# Altium PCB PCB1.pcbdoc (part 4 of 4)
Units mil, origin at the board's own origin, x right, y up, seen from the top; angles counter-clockwise.
Board outline 3067 x 4292.31 mil, 4 copper layers (Top Layer, Inner1, Inner2, Bottom Layer); 120 components, 131 nets, 693 pads, 342 vias.
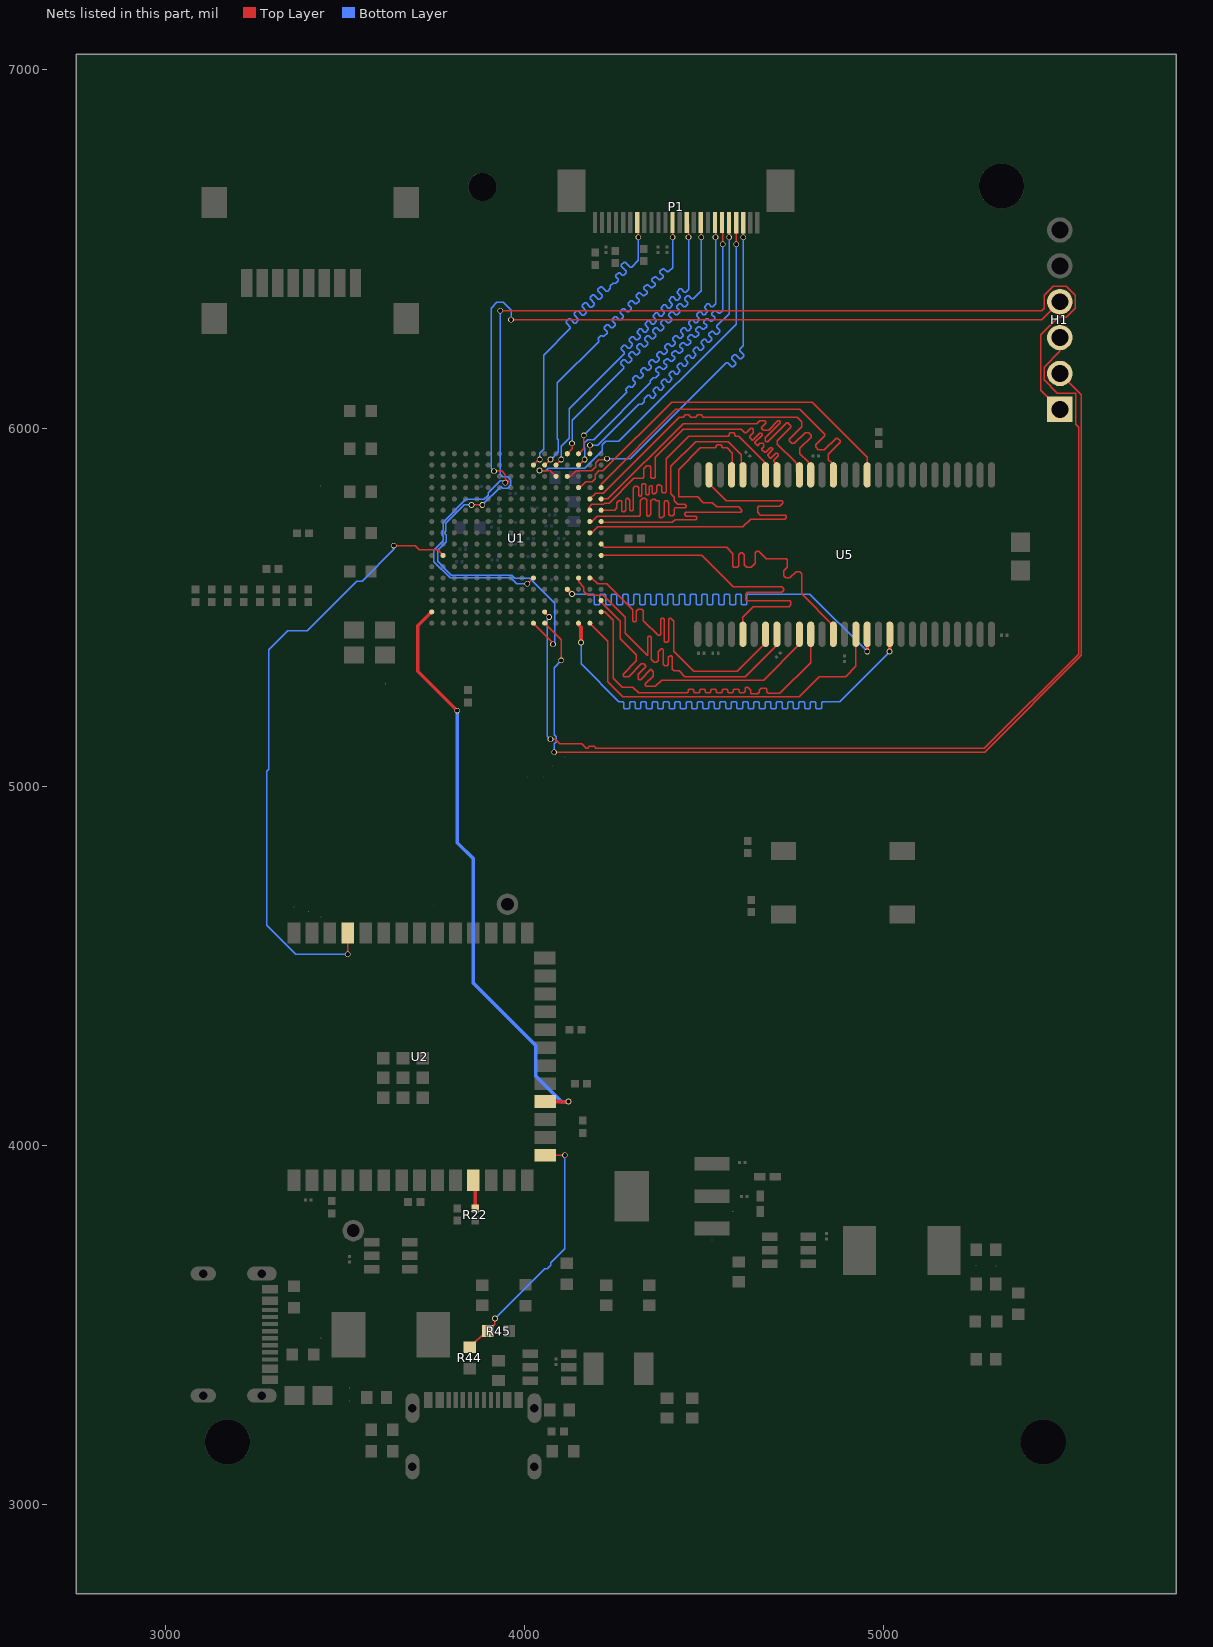
[diagram p6: the nets of this part, all layers, seen from the top]

## Via types
v1: diameter 15.75, hole 11.81, Top Layer to Bottom Layer, 336 vias
v2: diameter 19.68, hole 11.81, Top Layer to Bottom Layer, 4 vias
v3: diameter 39.37, hole 19.68, Top Layer to Bottom Layer, 2 vias

## Nets (pads, with @x,y where several pads share a name; then routed paths per layer and width w, separated by ;. In a path a pad name is that pad's centre, name@x,y a point inside that pad or via, vN(x,y) a via of type N, cw(c..) or ccw(c..) an arc to the next point about the centre after c; other vN are vias at no path point) (continued)
SD_DQ2: U1.K16 U5.5 | length 1006.3
  Top Layer w3.94: U1.K16@4213.53,5645.07 4494.56,5645.07 4582.31,5557.31 4717.31,5557.31 4722.31,5552.31 4722.31,5547.31 4716.67,5541.67 4620.95,5541.67 4616.6,5537.31 4616.6,5521.39 4618.96,5519.04 4739.53,5519.04 4742.31,5516.25 4742.31,5507.31 4737.36,5502.36 4637.36,5502.36 4608.18,5473.18 4608.18,5440.86 4608.85,5440.19 U5.5@4608.85,5430.19
SD_DQ3: U1.M15 U5.7 | length 978.3
  Top Layer w3.94: U1.M15@4182.03,5582.07 4185.17,5582.07 4185.76,5581.49 4187.62,5581.49 4203.49,5565.62 4229.01,5565.62 4301.71,5492.92 4301.71,5462.31 4304.49,5459.53 4308.43,5459.53 4311.22,5462.31 4311.22,5488.96 4317.31,5495.06 4327.31,5495.06 4331.25,5491.12 4331.25,5463.38 4372.31,5422.31 4377.31,5422.31 4379.59,5424.59 4379.59,5467.31 4382.38,5470.1 4386.31,5470.1 4389.1,5467.31 4389.1,5405.53 4392.31,5402.31 4397.31,5402.31 4402.18,5407.18 4402.18,5467.31 4404.5,5469.63 4407.78,5469.63 4416.54,5460.88 4416.54,5378.09 4472.31,5322.31 4592.52,5322.31 4666.17,5395.97 4666.17,5419.51 4666.85,5420.19 4666.85,5425.19 U5.7@4671.85,5430.19
SD_DQ4: U1.M14 U5.8 | length 1016.4
  Top Layer w3.94: U1.M14@4150.55,5582.07 4150.55,5571.85 4165.58,5556.81 4165.58,5545.77 4177.23,5534.12 4219.76,5534.12 4281.26,5472.62 4281.26,5427.31 4342.59,5365.99 4343.85,5367.25 4343.85,5417.31 4346.63,5420.1 4350.57,5420.1 4353.35,5417.31 4353.35,5355.23 4361.26,5347.31 4367.31,5347.31 4372,5352 4372,5376.5 4380.59,5385.1 4384.53,5385.1 4387.31,5382.31 4387.31,5341.25 4391.25,5337.31 4397.31,5337.31 4400.94,5340.94 4400.94,5360.45 4405.59,5365.1 4409.53,5365.1 4412.31,5362.31 4412.31,5328.19 4417.31,5323.19 4430.7,5323.19 4446.57,5307.31 4614.73,5307.31 4709.52,5402.1 4709.52,5424 U5.8@4703.34,5430.19
SD_DQ5: U1.P16 U5.10 | length 1006.4
  Top Layer w3.94: U1.P16@4213.53,5519.09 4213.53,5514.8 4266.5,5461.83 4266.5,5413.13 4311.13,5368.5 4311.13,5350.63 4274.53,5314.04 4274.53,5310.1 4277.31,5307.31 4289.92,5307.31 4324.92,5342.31 4332.31,5342.31 4337.31,5337.31 4337.31,5334.72 4316.82,5314.23 4316.82,5301.82 4319.6,5299.03 4323.54,5299.03 4352.07,5327.56 4358.71,5320.92 4358.71,5308.22 4337.03,5286.54 4337.03,5282.59 4339.82,5279.81 4364.81,5279.81 4382.31,5297.31 4667.01,5297.31 4766.34,5396.64 U5.10@4766.34,5430.19
SD_DQ6: U1.R16 U5.11 | length 990.6
  Top Layer w3.94: U1.R16@4213.53,5487.6 4223.92,5487.6 4247.31,5464.2 4247.31,5302.31 4272.18,5277.45 4302.18,5277.45 4317.95,5261.68 4453.44,5261.68 4456.23,5264.47 4456.23,5269.53 4459.01,5272.31 4469.19,5272.31 4471.97,5269.53 4471.97,5264.47 4474.76,5261.68 4484.94,5261.68 4487.72,5264.47 4487.72,5269.53 4490.51,5272.31 4500.69,5272.31 4503.47,5269.53 4503.47,5264.47 4506.25,5261.68 4516.43,5261.68 4519.22,5264.47 4519.22,5269.53 4522,5272.31 4532.18,5272.31 4534.97,5269.53 4534.97,5264.47 4537.75,5261.68 4547.93,5261.68 4550.71,5264.47 4550.71,5269.53 4553.5,5272.31 4563.68,5272.31 4566.46,5269.53 4566.46,5264.47 4569.25,5261.68 4579.43,5261.68 4582.21,5264.47 4582.21,5269.53 4584.99,5272.31 4595.17,5272.31 4597.96,5269.53 4597.96,5264.47 4600.74,5261.68 4611.66,5261.68 4615.59,5265.62 4615.59,5274.53 4618.38,5277.31 4622.31,5277.31 4630.43,5269.2 4630.43,5259.31 4650.59,5259.31 4654.53,5263.25 4654.53,5269.53 4659.53,5274.53 4672.31,5274.53 4675.1,5271.75 4675.1,5264.42 4679.04,5260.49 4711.76,5260.49 4797.31,5346.04 U5.11@4797.31,5410.31
SD_DQ7: U1.J16 U5.13 | length 993.5
  Top Layer w3.94: U1.J16@4213.53,5676.56 4222.78,5667.31 4563.4,5667.31 4580.59,5650.1 4580.59,5614.6 4583.38,5611.82 4592.88,5611.82 4596.82,5615.75 4596.82,5647.31 4602.19,5652.69 4606.94,5652.69 4612.39,5647.24 4612.39,5618.31 4618.88,5611.82 4631.82,5611.82 4642.95,5622.95 4642.95,5652.95 4647.31,5657.31 4652.95,5657.31 4675.31,5634.95 4675.46,5635.1 4729.53,5635.1 4732.31,5632.31 4732.31,5612.68 4722.31,5602.68 4722.31,5587.95 4727.95,5582.31 4739.63,5582.31 4756.78,5599.47 4767.31,5599.47 4772.41,5594.37 4772.41,5537.89 ; 4772.39,5537.87 4860.81,5449.45 U5.13@4860.81,5430.19
SD_DQ8: U1.D16 U5.42 | length 993.1
  Top Layer w3.94: U1.D16@4213.53,5834.05 4213.53,5844.05 4421.81,6052.31 4767.31,6052.31 4837.31,5982.31 4837.31,5979.13 4811.5,5953.31 4811.5,5947.31 4818.88,5939.93 4836,5939.93 4868.38,5972.31 4872.31,5972.31 4880.1,5964.53 4880.1,5960.1 4877.31,5957.31 4877.08,5957.31 4846.5,5926.74 4846.5,5912.31 4855.81,5903 4855.81,5879.44 U5.42@4860.81,5874.44
SD_DQ9: U1.E15 U5.44 | length 985.5
  Top Layer w3.94: U1.E15@4182.03,5802.56 4198.49,5819.01 4219.76,5819.01 4430.57,6029.81 4442.38,6029.81 4445.17,6032.6 4445.17,6034.53 4447.95,6037.31 4458.13,6037.31 4460.92,6034.53 4460.92,6032.6 4463.7,6029.81 4477.29,6029.81 4480.07,6032.6 4480.07,6034.53 4482.86,6037.31 4493.04,6037.31 4495.82,6034.53 4495.82,6032.6 4498.6,6029.81 4759.81,6029.81 4772.31,6017.31 4772.31,6003.97 4737.31,5968.97 4737.31,5964.7 4744.7,5957.31 4752.31,5957.31 4782.31,5987.31 4792.31,5987.31 4798.98,5980.65 4798.98,5975.08 4767.31,5943.41 4767.31,5928.51 4790.32,5905.5 4790.32,5881.94 U5.44@4797.82,5874.44
SD_DQ10: U1.E16 U5.45 | length 982.3
  Top Layer w3.94: U1.E16@4213.53,5802.56 4232.56,5802.56 4442.31,6012.31 4647.72,6012.31 4655.51,6020.1 4669.53,6020.1 4672.31,6017.31 4672.31,6013.93 4659.21,6000.83 4665.44,5994.6 4680.09,5994.6 4705.59,6020.1 4709.53,6020.1 4712.31,6017.31 4712.31,6014.69 4671.13,5973.5 4671.13,5964.57 4673.91,5961.78 4677.85,5961.78 4730.35,6014.28 4734.28,6014.28 4742.31,6006.25 4742.31,6002.31 4704.49,5964.49 4704.49,5955.55 4752.63,5907.41 4752.63,5907.2 4757.91,5901.93 4757.91,5878.38 4761.84,5874.44 U5.45@4766.34,5874.44
SD_DQ11: U1.F15 U5.47 | length 987.3
  Top Layer w3.94: U1.F15@4182.03,5771.06 4177.03,5776.06 4177.03,5777.03 4187.52,5787.52 4219.76,5787.52 4223.34,5791.09 4236.09,5791.09 4304.53,5859.53 4329.53,5859.53 4332.31,5862.31 4332.31,5887.31 4340.32,5895.32 4348.38,5895.32 4352.31,5891.39 4352.31,5862.31 4355.1,5859.53 4360.98,5859.53 4363.76,5862.31 4363.76,5918.76 4442.31,5997.31 4604.02,5997.31 4614.25,5987.08 4617.58,5987.08 4630.59,6000.1 4634.53,6000.1 4637.31,5997.31 4637.31,5987.31 4627.32,5977.32 4627.32,5974.01 4634.62,5966.71 4636.71,5966.71 4655.1,5985.1 4659.53,5985.1 4662.31,5982.31 4662.31,5980.56 4642.31,5960.56 4642.31,5959.02 4650.17,5951.16 4656.32,5957.31 4664.82,5957.31 4667.31,5954.82 4667.31,5948.54 4661.09,5942.31 4661.09,5940.25 4669.02,5932.31 4672.31,5932.31 4685.1,5945.1 4689.53,5945.1 4692.31,5942.31 4692.31,5940.4 4677.31,5925.4 4677.31,5924.02 4685,5916.34 4686.83,5916.34 4700.59,5930.1 4704.53,5930.1 4707.31,5927.31 4707.31,5923.45 4694.02,5910.15 4694.02,5907.31 4703.34,5898 U5.47@4703.34,5874.44
SD_DQ12: U1.F16 U5.48 | length 986.3
  Top Layer w3.94: U1.F16@4213.53,5771.06 4251.06,5771.06 4257.31,5777.31 4257.31,5792.31 4262.31,5797.31 4268.87,5797.31 4270.59,5795.59 4270.59,5770.1 4273.38,5767.31 4277.31,5767.31 4281.58,5771.58 4281.58,5801.58 4283.86,5803.86 4287.31,5803.86 4292.63,5798.54 4292.63,5772.49 4295.59,5769.53 4299.53,5769.53 4302.31,5772.31 4302.31,5832.31 4307.31,5837.31 4314.65,5837.31 4317.81,5834.16 4317.81,5812.31 4320.59,5809.53 4323.28,5809.53 4327.31,5813.56 4327.31,5842.14 4329.78,5844.6 4335.03,5844.6 4337.81,5841.82 4337.81,5817.31 4340.59,5814.53 4344.53,5814.53 4347.31,5817.31 4347.31,5837.31 4349.84,5839.84 4354.79,5839.84 4356.17,5838.46 4356.17,5819.52 4358.96,5816.73 4362.9,5816.73 4368.48,5822.31 4368.48,5838.48 4372.31,5842.31 4377.31,5842.31 4382.31,5837.31 4382.31,5822.31 4385.1,5819.53 4391.74,5819.53 4394.53,5822.31 4394.53,5914.53 4457.31,5977.31 4567.89,5977.31 4570.67,5980.1 4570.67,5984.53 4573.46,5987.31 4583.64,5987.31 4586.42,5984.53 4586.42,5980.1 4589.21,5977.31 4597.31,5977.31 4669.54,5905.09 4669.54,5878.38 4671.85,5876.08 U5.48@4671.85,5874.44
SD_DQ13: U1.G15 U5.50 | length 986.5
  Top Layer w3.94: U1.G15@4182.03,5739.56 4187.6,5739.56 4202.64,5754.59 4319.59,5754.59 4322.31,5757.31 4322.31,5797.31 4329.53,5804.53 4335.1,5804.53 4340.1,5799.53 4340.1,5757.31 4342.88,5754.53 4346.82,5754.53 4352.31,5760.03 4352.31,5797.31 4357.31,5802.31 4362.31,5802.31 4367.31,5797.31 4375.83,5797.31 4375.83,5752.31 4378.62,5749.53 4382.56,5749.53 4388.83,5755.8 4388.83,5795.09 4391.06,5797.31 4397.31,5797.31 4402.31,5792.31 4402.31,5760.19 4406.25,5756.25 4413.38,5756.25 4417.31,5760.19 4417.31,5775.68 4418.95,5777.31 4447.31,5777.31 4450.1,5780.1 4450.1,5784.04 4447.01,5787.12 4427.51,5787.12 4417.31,5797.31 4417.31,5806.82 4407.77,5816.36 4407.77,5893.01 4477.08,5962.31 4567.31,5962.31 4604.19,5925.44 4604.19,5879.11 U5.50@4608.85,5874.44
SD_DQ14: U1.G16 U5.51 | length 983.1
  Top Layer w3.94: U1.G16@4213.53,5739.56 4216.03,5737.06 4412.06,5737.06 4419.68,5744.68 4477.31,5744.68 4480.1,5747.46 4480.1,5751.4 4477.31,5754.18 4450.45,5754.18 4446.01,5758.62 4446.01,5761.01 4449.74,5764.74 4602.31,5764.74 4605.1,5767.53 4605.1,5771.46 4596.46,5780.1 4535.59,5780.1 4523.38,5792.31 4498.83,5792.31 4482.31,5808.83 4429.18,5808.83 4429.18,5884.18 4489.81,5944.81 4531.69,5944.81 4534.47,5947.6 4534.47,5950.5 4537.26,5953.29 4547.44,5953.29 4550.22,5950.5 4550.22,5947.6 4553,5944.81 4564.81,5944.81 4579.18,5930.45 4579.18,5887.62 U5.51@4579.85,5886.94
SD_DQ15: U1.H15 U5.53 | length 996.9
  Top Layer w3.94: U1.H15@4182.03,5708.06 4187.03,5708.06 4203.49,5724.52 4608.45,5724.52 4630.39,5746.46 4725.96,5746.46 4730.1,5750.59 4730.1,5754.53 4727.31,5757.31 4657.31,5757.31 4649.53,5765.1 4649.53,5779.53 4652.31,5782.31 4711.82,5782.31 4720.1,5790.59 4720.1,5794.53 4717.31,5797.31 4562.31,5797.31 4519.36,5840.27 U5.53@4519.36,5869.44
SD_DQM0: U1.T15 U5.15 | length 1017.6
  Top Layer w3.94: U1.T15@4182.03,5456.1 4232.32,5405.8 4232.31,5292.32 4273.19,5251.44 4765.12,5251.44 4821,5307.31 4895.76,5307.31 4923.81,5335.37 U5.15@4923.81,5425.19
SD_DQM1: U1.D14 U5.39 | length 1020
  Top Layer w3.94: U1.D14@4150.55,5834.05 4154.05,5834.05 4170.51,5850.51 4188.26,5850.51 4197.07,5859.32 4197.07,5870.35 4207.31,5880.58 4218.35,5880.58 4410.08,6072.32 4801.7,6072.32 4955.65,5918.37 4955.65,5879.45 U5.39@4950.65,5874.44
SD_RAS_N: U1.T14 U5.18 | length 1722.8
  Top Layer w10: U1.T14@4152.31,5449.56 4157.31,5444.56 v1(4157.31,5402.31) ; v1(5017.31,5377.31) 5018.3,5378.3 U5.18@5018.3,5425.19
  Bottom Layer w3.94: v1(4157.31,5402.31) 4157.31,5342.31 4262.31,5237.31 4274.13,5237.31 4276.91,5234.53 4276.91,5220.1 4279.69,5217.31 4289.87,5217.31 4292.66,5220.1 4292.66,5234.53 4295.44,5237.31 4305.62,5237.31 4308.41,5234.53 4308.41,5220.1 4311.19,5217.31 4321.37,5217.31 4324.15,5220.1 4324.15,5234.53 4326.94,5237.31 4337.12,5237.31 4339.9,5234.53 4339.9,5220.1 4342.69,5217.31 4352.87,5217.31 4355.65,5220.1 4355.65,5234.53 4358.43,5237.31 4368.61,5237.31 4371.4,5234.53 4371.4,5220.1 4374.18,5217.31 4384.36,5217.31 4387.15,5220.1 4387.15,5234.53 4389.93,5237.31 4400.11,5237.31 4402.89,5234.53 4402.89,5220.1 4405.68,5217.31 4415.86,5217.31 4418.64,5220.1 4418.64,5234.53 4421.43,5237.31 4431.61,5237.31 4434.39,5234.53 4434.39,5220.1 4437.17,5217.31 4447.35,5217.31 4450.14,5220.1 4450.14,5234.53 4452.92,5237.31 4463.1,5237.31 4465.89,5234.53 4465.89,5220.1 4468.67,5217.31 4478.85,5217.31 4481.63,5220.1 4481.63,5234.53 4484.42,5237.31 4494.6,5237.31 4497.38,5234.53 4497.38,5220.1 4500.17,5217.31 4510.35,5217.31 4513.13,5220.1 4513.13,5234.53 4515.91,5237.31 4526.09,5237.31 4528.88,5234.53 4528.88,5220.1 4531.66,5217.31 4541.84,5217.31 4544.63,5220.1 4544.63,5234.53 4547.41,5237.31 4557.59,5237.31 4560.37,5234.53 4560.37,5220.1 4563.16,5217.31 4573.34,5217.31 4576.12,5220.1 4576.12,5234.53 4578.91,5237.31 4589.09,5237.31 4591.87,5234.53 4591.87,5220.1 4594.65,5217.31 4604.83,5217.31 4607.62,5220.1 4607.62,5234.53 4610.4,5237.31 4620.58,5237.31 4623.37,5234.53 4623.37,5220.1 4626.15,5217.31 4636.33,5217.31 4639.11,5220.1 4639.11,5234.53 4641.9,5237.31 4652.08,5237.31 4654.86,5234.53 4654.86,5220.1 4657.65,5217.31 4667.83,5217.31 4670.61,5220.1 4670.61,5234.53 4673.39,5237.31 4683.57,5237.31 4686.36,5234.53 4686.36,5220.1 4689.14,5217.31 4699.32,5217.31 4702.11,5220.1 4702.11,5234.53 4704.89,5237.31 4715.07,5237.31 4717.85,5234.53 4717.85,5220.1 4720.64,5217.31 4730.82,5217.31 4733.6,5220.1 4733.6,5234.53 4736.39,5237.31 4746.57,5237.31 4749.35,5234.53 4749.35,5220.1 4752.13,5217.31 4762.31,5217.31 4765.1,5220.1 4765.1,5234.53 4767.88,5237.31 4778.06,5237.31 4780.85,5234.53 4780.85,5220.1 4783.63,5217.31 4793.81,5217.31 4796.59,5220.1 4796.59,5234.53 4799.38,5237.31 4809.56,5237.31 4812.34,5234.53 4812.34,5220.1 4815.13,5217.31 4825.31,5217.31 4828.09,5220.1 4828.09,5234.53 4830.87,5237.31 4879.19,5237.31 5017.31,5375.44 v1(5017.31,5377.31)
SD_WE_N: U1.N13 U5.16 | length 1704.6
  Top Layer w10: U1.N13@4119.05,5550.59 v1(4132.31,5537.31) ; v1(4955.31,5377.31) U5.16@4955.31,5425.19
  Bottom Layer w3.94: v1(4132.31,5537.31) 4191.69,5537.31 4194.48,5534.53 4194.48,5510.1 4197.26,5507.31 4207.44,5507.31 4210.23,5510.1 4210.23,5534.53 4213.01,5537.31 4223.19,5537.31 4225.97,5534.53 4225.97,5510.1 4228.76,5507.31 4238.94,5507.31 4241.72,5510.1 4241.72,5534.53 4244.51,5537.31 4254.69,5537.31 4257.47,5534.53 4257.47,5510.1 4260.25,5507.31 4270.43,5507.31 4273.22,5510.1 4273.22,5534.53 4276,5537.31 4286.18,5537.31 4288.97,5534.53 4288.97,5510.1 4291.75,5507.31 4301.93,5507.31 4304.71,5510.1 4304.71,5534.53 4307.5,5537.31 4317.68,5537.31 4320.46,5534.53 4320.46,5510.1 4323.25,5507.31 4333.43,5507.31 4336.21,5510.1 4336.21,5534.53 4338.99,5537.31 4349.17,5537.31 4351.96,5534.53 4351.96,5510.1 4354.74,5507.31 4364.92,5507.31 4367.71,5510.1 4367.71,5534.53 4370.49,5537.31 4380.67,5537.31 4383.45,5534.53 4383.45,5510.1 4386.24,5507.31 4396.42,5507.31 4399.2,5510.1 4399.2,5534.53 4401.99,5537.31 4412.17,5537.31 4414.95,5534.53 4414.95,5510.1 4417.73,5507.31 4427.91,5507.31 4430.7,5510.1 4430.7,5534.53 4433.48,5537.31 4443.66,5537.31 4446.45,5534.53 4446.45,5510.1 4449.23,5507.31 4459.41,5507.31 4462.19,5510.1 4462.19,5534.53 4464.98,5537.31 4475.16,5537.31 4477.94,5534.53 4477.94,5510.1 4480.73,5507.31 4490.91,5507.31 4493.69,5510.1 4493.69,5534.53 4496.47,5537.31 4506.65,5537.31 4509.44,5534.53 4509.44,5510.1 4512.22,5507.31 4522.4,5507.31 4525.19,5510.1 4525.19,5534.53 4527.97,5537.31 4538.15,5537.31 4540.93,5534.53 4540.93,5510.1 4543.72,5507.31 4553.9,5507.31 4556.68,5510.1 4556.68,5534.53 4559.47,5537.31 4569.65,5537.31 4572.43,5534.53 4572.43,5510.1 4575.21,5507.31 4585.39,5507.31 4588.18,5510.1 4588.18,5534.53 4590.96,5537.31 4601.14,5537.31 4603.93,5534.53 4603.93,5510.1 4606.71,5507.31 4616.89,5507.31 4619.67,5510.1 4619.67,5534.53 4622.46,5537.31 4795.31,5537.31 v1(4955.31,5377.31)
SDA: R22.1 U2.11 | length 75.5
  Top Layer w10: R22.1@3862.12,3827.32 U2.11@3862.12,3902.82
SSPI_CS_N: U1.R1 U2.18 | length 1626.8
  Top Layer w10: U1.R1@3741.09,5487.6 3702.32,5448.81 3702.32,5322.31 v1(3812.32,5212.31) ; U2.18@4062.51,4122.31 v1(4122.31,4122.31)
  Bottom Layer w10: v1(3812.32,5212.31) 3812.32,4844.07 3857.32,4799.07 3857.32,4452.31 4031.25,4278.38 4031.25,4193.38 4102.31,4122.31 v1(4122.31,4122.31)
TCK: H1.1 U1.T10 | length 3482.3
  Top Layer w3.94: v1(3852.16,5785.71) 3860.46,5785.71 3860.85,5786.09 3873.3,5786.09 3873.69,5785.71 3880.71,5785.71 v1@3882.32,5787.31 ; v1(3932.32,6327.31) 5441.68,6327.31 5448.93,6334.57 5448.93,6370.29 5474.34,6395.7 5510.29,6395.7 5535.7,6370.29 5535.7,6334.34 5510.29,6308.93 5487.57,6308.93 5439.05,6260.41 5439.05,6105.58 H1.1@5492.31,6052.31 ; U1.T10@4024.55,5456.1 4079.05,5401.6 v1(4079.05,5397.31)
  Bottom Layer w3.94: v1(3852.16,5785.71) 3831.85,5785.71 3780.54,5734.4 3780.54,5712.5 3778.6,5710.56 3778.6,5704.55 3781.02,5702.13 3781.02,5682.5 3757.32,5658.8 3757.32,5628.45 3795.58,5590.19 3964.82,5590.19 3973.23,5581.78 4013.87,5581.78 4084.21,5511.44 4084.21,5402.48 v1(4079.05,5397.31) ; v1(3882.32,5785.71) 3932.32,5835.71 3935.65,5835.71 3939.26,5832.09 3952.38,5832.09 3961.65,5841.36 3961.65,5854.48 3952.38,5863.75 3939.26,5863.75 3932.32,5870.7 v1(3932.32,6327.31)
TDI: H1.3 U1.R11 | length 2931.3
  Top Layer w3.94: U1.R11@4056.05,5487.6 4056.05,5485.72 v1(4068.39,5473.39) ; v1(4072.32,5132.31) 4085.24,5132.31 4098.11,5119.44 4159.13,5119.44 4171.25,5107.32 4175.76,5107.32 4180.76,5112.31 4193.87,5112.31 4198.87,5107.32 5282.32,5107.32 5544.44,5369.44 5544.44,6001.94 5536.06,6010.33 5536.06,6097.44 5485.83,6097.44 5448.93,6134.34 5448.93,6170.29 5492.31,6213.67 H1.3@5492.31,6252.31
  Bottom Layer w3.94: v1(4068.39,5473.39) 4063.22,5468.22 4063.22,5141.41 v1(4072.32,5132.31)
TDO: H1.4 U1.M10 | length 2836.6
  Top Layer w3.94: v1(3914.81,5879.9) 3923.16,5879.9 3923.85,5880.58 3936.3,5880.58 3946.53,5870.35 3946.53,5859.32 3955.34,5850.51 3955.34,5849.08 3954.17,5847.92 v1(3945.82,5847.92) ; v1(3962.32,6302.31) 5442.31,6302.31 H1.4@5492.31,6352.31 ; v1(4007.32,5565.96) 4008.44,5565.96 U1.M10@4024.55,5582.07
  Bottom Layer w3.94: v1(3914.81,5879.9) 3906.49,5888.22 3906.49,6334.52 3922.24,6350.27 3941.18,6350.27 3962.32,6329.13 v1(3962.32,6302.31) ; v1(3945.82,5847.92) 3940.82,5852.92 3931.78,5852.92 3898.14,5819.28 3898.14,5813.11 3886.57,5801.54 3836.54,5801.54 3772.66,5737.66 3772.66,5715.76 3770.72,5713.82 3770.72,5701.29 3773.14,5698.87 3773.14,5685.76 3747.32,5659.93 3747.32,5627.31 3792.32,5582.31 3961.56,5582.31 3977.92,5565.96 v1(4007.32,5565.96)
TMS: H1.2 U1.T11 | length 2784.6
  Top Layer w3.94: U1.T11@4056.05,5456.1 4102.31,5409.84 v1(4102.31,5352.31) ; v1(4082.32,5096.49) 5282.62,5096.49 5552.31,5366.18 5552.31,6092.31 H1.2@5492.31,6152.31
  Bottom Layer w3.94: v1(4082.32,5096.49) 4082.32,5119.93 4088.14,5125.76 4088.14,5138.87 4082.32,5144.7 4082.32,5332.31 v1(4102.31,5352.31)
TX: U1.K2 U2.37 | length 1715.7
  Top Layer w3.94: v1@3507.12,4532.31 U2.37@3507.12,4591.81 ; v1@3632.32,5672.31 3694.93,5672.31 3705.76,5661.49 3756.11,5661.49 ; 3756.14,5661.53 U1.K2@3772.59,5645.07
  Bottom Layer w3.94: v1(3507.12,4533.14) 3361.49,4533.14 3281.41,4613.22 3281.41,5043.5 3287.32,5049.41 3287.32,5382.31 3339.44,5434.44 3393.46,5434.44 3532.63,5573.61 3547.13,5573.61 3635.27,5661.75 v1(3635.27,5672.31)
USB_VBUS: R44.1 R45.2 U2.15 | length 707.4
  Top Layer w3.94: R44.1@3847.32,3436.97 3892.66,3482.32 R45.2@3897.66,3482.32 3917.32,3501.97 v1(3917.32,3517.32) ; U2.15@4057.51,3972.32 v1(4112.31,3972.32)
  Bottom Layer w3.94: v1(3917.32,3517.32) 4056.15,3656.15 4063.87,3656.15 4073.14,3665.42 4073.14,3673.14 4112.31,3712.32 v1(4112.31,3972.32)
VSYNC: P1.7 U1.B10 | length 1065.2
  Top Layer w3.94: U1.B10@4024.55,5897.03 4040.14,5912.62 v1(4042.01,5912.62) ; P1.7@4314.22,6572.88 4317.31,6569.78 v1(4317.31,6532.31)
  Bottom Layer w3.94: v1(4042.01,5912.62) 4042.01,5929.63 4053.14,5940.76 4053.14,6203.14 4127.75,6277.75 4127.75,6281.69 4115.58,6293.86 4115.58,6297.8 4122.78,6305 4126.72,6305 4138.89,6292.82 4142.82,6292.82 4150.02,6300.02 4150.02,6303.96 4137.85,6316.13 4137.85,6320.07 4145.05,6327.27 4148.99,6327.27 4161.16,6315.1 4165.1,6315.1 4172.29,6322.29 4172.29,6326.23 4160.12,6338.4 4160.12,6342.34 4167.32,6349.54 4171.26,6349.54 4183.43,6337.37 4187.37,6337.37 4194.57,6344.57 4194.57,6348.5 4182.39,6360.67 4182.39,6364.61 4189.59,6371.81 4193.53,6371.81 4205.7,6359.64 4209.64,6359.64 4216.84,6366.84 4216.84,6370.77 4204.67,6382.94 4204.67,6386.88 4211.86,6394.08 4215.8,6394.08 4227.97,6381.91 4231.91,6381.91 4239.25,6389.25 4239.25,6396.84 4246.6,6404.18 4254.18,6404.18 4261.38,6411.38 4261.38,6415.32 4254.84,6421.85 4254.84,6425.79 4262.04,6432.99 4265.98,6432.99 4272.51,6426.45 4276.45,6426.45 4283.65,6433.65 4283.65,6437.59 4270.09,6451.15 4270.09,6455.09 4277.29,6462.29 4281.22,6462.29 4294.79,6448.72 4298.72,6448.72 4317.31,6467.31 v1(4317.31,6532.31)
Y2: P1.19 U1.B14 | length 1063
  Top Layer w3.94: U1.B14@4150.55,5897.03 4165.82,5912.31 v1(4167.31,5912.31) ; P1.19@4550.41,6572.88 4552.31,6570.97 v1(4552.31,6512.31)
  Bottom Layer w3.94: v1(4167.31,5912.31) 4167.31,5944.93 4166.49,5945.76 4166.49,5958.87 4175.76,5968.14 4193.14,5968.14 4350.8,6125.8 4350.8,6132.31 4358.67,6140.19 4365.19,6140.19 4373.68,6148.68 4373.68,6152.61 4366.28,6160.02 4366.28,6163.95 4373.47,6171.15 4377.41,6171.15 4384.81,6163.75 4388.75,6163.75 4395.95,6170.95 4395.95,6174.89 4388.55,6182.29 4388.55,6186.22 4395.75,6193.42 4399.68,6193.42 4407.08,6186.02 4411.02,6186.02 4418.22,6193.22 4418.22,6197.16 4410.82,6204.56 4410.82,6208.49 4418.02,6215.69 4421.95,6215.69 4429.36,6208.29 4433.29,6208.29 4440.49,6215.49 4440.49,6219.43 4433.09,6226.83 4433.09,6230.77 4440.29,6237.96 4444.23,6237.96 4451.63,6230.56 4455.56,6230.56 4462.76,6237.76 4462.76,6241.7 4455.36,6249.1 4455.36,6253.04 4462.56,6260.24 4466.5,6260.24 4473.9,6252.83 4477.83,6252.83 4485.03,6260.03 4485.03,6263.97 4477.63,6271.37 4477.63,6275.31 4484.83,6282.51 4488.77,6282.51 4496.17,6275.11 4500.11,6275.11 4507.3,6282.3 4507.3,6286.24 4499.9,6293.64 4499.9,6297.58 4507.1,6304.78 4511.04,6304.78 4518.44,6297.38 4522.38,6297.38 4529.58,6304.58 4529.58,6308.51 4522.17,6315.91 4522.17,6319.85 4529.37,6327.05 4533.31,6327.05 4540.71,6319.65 4544.65,6319.65 4552.31,6327.31 v1(4552.31,6512.31)
Y3: P1.21 U1.C12 | length 1062.7
  Top Layer w3.94: v1(4041.76,5881.72) 4071.38,5881.72 U1.C12@4087.55,5865.55 ; v1(4589.88,6512.31) P1.21@4589.88,6572.76
  Bottom Layer w3.94: v1(4041.76,5881.72) 4059.45,5881.72 4065.71,5887.98 4167.98,5887.98 4216.49,5936.49 4216.49,5953.87 4225.76,5963.14 4263.14,5963.14 4589.88,6289.88 v1(4589.88,6512.31)
Y4: P1.22 U1.C13 | length 1062.8
  Top Layer w3.94: U1.C13@4119.05,5865.55 4129.28,5865.55 4144.32,5880.58 4186.85,5880.58 4198.5,5892.23 4198.5,5903.26 4207.31,5912.07 4226.69,5912.07 v1(4229.63,5915) ; v1(4609.55,6532.31) P1.22@4609.55,6572.76
  Bottom Layer w3.94: v1(4229.63,5915) 4295,5915 4562.52,6182.52 4566.45,6182.52 4577.52,6171.45 4581.45,6171.45 4588.65,6178.65 4588.65,6182.59 4577.59,6193.65 4577.59,6197.59 4584.79,6204.79 4588.73,6204.79 4599.79,6193.73 4603.73,6193.73 4610.92,6200.92 4610.92,6204.86 4599.86,6215.92 4599.86,6219.86 4609.55,6229.55 v1(4609.55,6532.31)
Y5: P1.20 U1.A15 | length 1063.7
  Top Layer w3.94: U1.A15@4182.03,5928.53 4182.31,5928.81 v1(4182.31,5952.31) ; v1(4570.18,6532.31) P1.20@4570.18,6572.76
  Bottom Layer w3.94: v1(4182.31,5952.31) 4203.8,5952.31 4317.88,6066.4 4321.82,6066.4 4322.14,6066.07 4326.07,6066.07 4333.27,6073.27 4333.27,6077.21 4332.95,6077.53 4332.95,6081.47 4343.19,6091.71 4347.13,6091.71 4354.95,6083.89 4358.89,6083.89 4366.09,6091.09 4366.09,6095.03 4358.27,6102.85 4358.27,6106.78 4365.47,6113.98 4369.4,6113.98 4377.22,6106.16 4381.16,6106.16 4388.36,6113.36 4388.36,6117.3 4380.54,6125.12 4380.54,6129.06 4387.74,6136.25 4391.67,6136.25 4399.5,6128.43 4403.43,6128.43 4410.63,6135.63 4410.63,6139.57 4402.81,6147.39 4402.81,6151.33 4410.01,6158.53 4413.94,6158.53 4421.77,6150.7 4425.7,6150.7 4432.9,6157.9 4432.9,6161.84 4425.08,6169.66 4425.08,6173.6 4432.28,6180.8 4436.22,6180.8 4444.04,6172.97 4447.97,6172.97 4455.17,6180.17 4455.17,6184.11 4447.35,6191.93 4447.35,6195.87 4454.55,6203.07 4458.49,6203.07 4466.31,6195.25 4470.25,6195.25 4477.44,6202.44 4477.44,6206.38 4469.62,6214.2 4469.62,6218.14 4476.82,6225.34 4480.76,6225.34 4488.58,6217.52 4492.52,6217.52 4499.72,6224.72 4499.72,6228.65 4491.89,6236.47 4491.89,6240.41 4499.09,6247.61 4503.03,6247.61 4510.85,6239.79 4514.79,6239.79 4521.99,6246.99 4521.99,6250.92 4514.16,6258.75 4514.16,6262.68 4521.36,6269.88 4525.3,6269.88 4533.12,6262.06 4537.06,6262.06 4544.26,6269.26 4544.26,6273.19 4536.44,6281.02 4536.44,6284.95 4570.18,6318.7 v1(4570.18,6532.31)
Y6: P1.18 U1.A14 | length 1065.4
  Top Layer w3.94: U1.A14@4150.55,5928.53 4164.93,5942.92 v1(4164.93,5979.7) ; P1.18@4530.73,6572.88 4532.31,6571.29 v1(4532.31,6532.31)
  Bottom Layer w3.94: v1(4164.93,5979.7) 4284.55,6099.31 4284.55,6103.25 4282.75,6105.05 4282.75,6108.98 4289.95,6116.18 4293.89,6116.18 4295.68,6114.39 4299.62,6114.39 4308.64,6123.4 4308.64,6127.34 4301.34,6134.64 4301.34,6138.57 4308.54,6145.77 4312.47,6145.77 4319.77,6138.47 4323.71,6138.47 4330.91,6145.67 4330.91,6149.61 4323.61,6156.91 4323.61,6160.84 4330.81,6168.04 4334.74,6168.04 4342.04,6160.74 4345.98,6160.74 4353.18,6167.94 4353.18,6171.88 4345.88,6179.18 4345.88,6183.11 4353.08,6190.31 4357.02,6190.31 4364.31,6183.02 4368.25,6183.02 4375.45,6190.21 4375.45,6194.15 4368.15,6201.45 4368.15,6205.39 4375.35,6212.58 4379.29,6212.58 4386.58,6205.29 4390.52,6205.29 4397.72,6212.48 4397.72,6216.42 4390.42,6223.72 4390.42,6227.66 4397.62,6234.85 4401.56,6234.85 4408.86,6227.56 4412.79,6227.56 4419.99,6234.76 4419.99,6238.69 4412.69,6245.99 4412.69,6249.93 4419.89,6257.13 4423.83,6257.13 4431.13,6249.83 4435.06,6249.83 4442.26,6257.03 4442.26,6260.96 4434.96,6268.26 4434.96,6272.2 4442.16,6279.4 4446.1,6279.4 4453.4,6272.1 4457.33,6272.1 4464.53,6279.3 4464.53,6283.24 4457.24,6290.53 4457.24,6294.47 4464.43,6301.67 4468.37,6301.67 4475.67,6294.37 4479.61,6294.37 4486.8,6301.57 4486.8,6305.51 4479.51,6312.8 4479.51,6316.74 4486.71,6323.94 4490.64,6323.94 4497.94,6316.64 4501.88,6316.64 4509.08,6323.84 4509.08,6327.78 4501.78,6335.07 4501.78,6339.01 4508.98,6346.21 4512.91,6346.21 4520.21,6338.91 4524.15,6338.91 4532.31,6347.08 v1(4532.31,6532.31)
Y7: P1.16 U1.A13 | length 1058.8
  Top Layer w3.94: U1.A13@4119.05,5928.53 4132.31,5941.81 v1(4132.31,5957.31) ; P1.16@4491.36,6572.85 4492.31,6571.89 v1(4492.31,6532.31)
  Bottom Layer w3.94: v1(4132.31,5957.31) 4132.31,6022.31 4277.12,6167.12 4277.12,6171.06 4268.56,6179.62 4268.56,6183.56 4275.75,6190.75 4279.69,6190.75 4288.25,6182.19 4292.19,6182.19 4299.39,6189.39 4299.39,6193.33 4290.83,6201.89 4290.83,6205.83 4298.03,6213.03 4301.96,6213.03 4310.53,6204.46 4314.46,6204.46 4321.66,6211.66 4321.66,6215.6 4313.1,6224.16 4313.1,6228.1 4320.3,6235.3 4324.23,6235.3 4332.8,6226.73 4336.73,6226.73 4343.93,6233.93 4343.93,6237.87 4335.37,6246.43 4335.37,6250.37 4342.57,6257.57 4346.5,6257.57 4355.07,6249 4359,6249 4366.2,6256.2 4366.2,6260.14 4357.64,6268.7 4357.64,6272.64 4364.84,6279.84 4368.78,6279.84 4377.34,6271.28 4381.28,6271.28 4388.47,6278.47 4388.47,6282.41 4379.91,6290.97 4379.91,6294.91 4387.11,6302.11 4391.05,6302.11 4399.61,6293.55 4403.55,6293.55 4410.75,6300.75 4410.75,6304.68 4402.18,6313.25 4402.18,6317.18 4409.38,6324.38 4413.32,6324.38 4421.88,6315.82 4425.82,6315.82 4433.02,6323.02 4433.02,6326.95 4424.45,6335.52 4424.45,6339.45 4431.65,6346.65 4435.59,6346.65 4444.15,6338.09 4448.09,6338.09 4455.29,6345.29 4455.29,6349.22 4446.72,6357.79 4446.72,6361.72 4453.92,6368.92 4457.86,6368.92 4466.42,6360.36 4470.36,6360.36 4492.31,6382.31 v1(4492.31,6532.31)
Y8: P1.14 U1.B12 | length 1061.7
  Top Layer w3.94: U1.B12@4087.55,5897.03 4102.31,5911.8 v1(4102.31,5912.31) ; P1.14@4452.02,6572.88 4457.17,6567.72 v1(4457.17,6532.17)
  Bottom Layer w3.94: v1(4102.31,5912.31) 4102.31,5949.7 4124.44,5971.82 4124.44,6054.44 4277.9,6207.9 4277.9,6211.84 4269.34,6220.4 4269.34,6224.34 4276.54,6231.54 4280.47,6231.54 4289.04,6222.97 4292.97,6222.97 4300.59,6230.59 4300.59,6234.53 4292.03,6243.09 4292.03,6247.03 4299.23,6254.23 4303.17,6254.23 4311.73,6245.67 4315.67,6245.67 4322.86,6252.86 4322.86,6256.8 4314.3,6265.36 4314.3,6269.3 4321.5,6276.5 4325.44,6276.5 4334,6267.94 4337.94,6267.94 4345.13,6275.13 4345.13,6279.07 4336.57,6287.63 4336.57,6291.57 4343.77,6298.77 4347.71,6298.77 4356.27,6290.21 4360.21,6290.21 4367.41,6297.41 4367.41,6301.34 4358.84,6309.91 4358.84,6313.84 4366.04,6321.04 4369.98,6321.04 4378.54,6312.48 4382.48,6312.48 4389.68,6319.68 4389.68,6323.61 4381.11,6332.18 4381.11,6336.11 4388.31,6343.31 4392.25,6343.31 4400.81,6334.75 4404.75,6334.75 4411.95,6341.95 4411.95,6345.89 4403.39,6354.45 4403.39,6358.39 4410.58,6365.58 4414.52,6365.58 4423.08,6357.02 4427.02,6357.02 4434.22,6364.22 4434.22,6368.16 4425.66,6376.72 4425.66,6380.66 4432.85,6387.85 4436.79,6387.85 4445.35,6379.29 4449.29,6379.29 4457.17,6387.17 v1(4457.17,6532.17)
Y9: P1.12 U1.B11 | length 1064.8
  Top Layer w3.94: U1.B11@4056.05,5897.03 4071.34,5912.31 v1(4072.32,5912.31) ; v1(4412.65,6532.31) P1.12@4412.65,6572.88
  Bottom Layer w3.94: v1(4072.32,5912.31) 4094.44,5934.44 4094.44,5967.81 4091.49,5970.76 4091.49,6126.49 4206.14,6241.14 4206.14,6245.08 4205.08,6246.14 4205.08,6250.08 4212.28,6257.28 4216.21,6257.28 4217.28,6256.21 4221.21,6256.21 4230.12,6265.12 4230.12,6269.06 4221.56,6277.62 4221.56,6281.56 4228.76,6288.76 4232.69,6288.76 4241.26,6280.19 4245.19,6280.19 4252.39,6287.39 4252.39,6291.33 4243.83,6299.89 4243.83,6303.83 4251.03,6311.03 4254.97,6311.03 4263.53,6302.47 4267.47,6302.47 4274.66,6309.66 4274.66,6313.6 4266.1,6322.16 4266.1,6326.1 4273.3,6333.3 4277.24,6333.3 4285.8,6324.74 4289.74,6324.74 4296.94,6331.94 4296.94,6335.87 4288.37,6344.44 4288.37,6348.37 4295.57,6355.57 4299.51,6355.57 4308.07,6347.01 4312.01,6347.01 4319.21,6354.21 4319.21,6358.14 4310.64,6366.71 4310.64,6370.64 4317.84,6377.84 4321.78,6377.84 4330.34,6369.28 4334.28,6369.28 4341.48,6376.48 4341.48,6380.41 4332.91,6388.98 4332.91,6392.91 4340.11,6400.11 4344.05,6400.11 4352.61,6391.55 4356.55,6391.55 4363.75,6398.75 4363.75,6402.69 4355.19,6411.25 4355.19,6415.19 4362.38,6422.38 4366.32,6422.38 4374.88,6413.82 4378.82,6413.82 4386.02,6421.02 4386.02,6424.96 4377.46,6433.52 4377.46,6437.46 4384.66,6444.66 4388.59,6444.66 4397.16,6436.09 4401.09,6436.09 4412.65,6447.65 v1(4412.65,6532.31)
pads on no net: P1.1 P1.23 P1.24 SCREW1.1 SCREW2.1 SCREW3.1 SCREW4.1 U1.A9 U1.B3 U1.B8 U1.B13 U1.B15 U1.B16 U1.C1 U1.C2 U1.C3 U1.C4 U1.C5 U1.C6 U1.C9 U1.C10 U1.C11 U1.C14 U1.C15 U1.C16 U1.D1 U1.D3 U1.D4 U1.D5 U1.D6 U1.D7 U1.D8 U1.D9 U1.D10 U1.D11 U1.D12 U1.D13 U1.E3 U1.E4 U1.E5 U1.E6 U1.E7 U1.E8 U1.E9 U1.E10 U1.E11 U1.E12 U1.E13 U1.E14 U1.F3 U1.F4 U1.F5 U1.F12 U1.F13 U1.F14 U1.G3 U1.G4 U1.G5 U1.G12 U1.G13 U1.G14 U1.H2 U1.H3 U1.H4 U1.H5 U1.H12 U1.H13 U1.H14 U1.J3 U1.J4 U1.J5 U1.J12 U1.J13 U1.K3 U1.K4 U1.K5 U1.K13 U1.K14 U1.K15 U1.L1 U1.L2 U1.L3 U1.L4 U1.L5 U1.L13 U1.L14 U1.L16 U1.M2 U1.M3 U1.M4 U1.M5 U1.M6 U1.M7 U1.M9 U1.M11 U1.M12 U1.M13 U1.N1 U1.N3 U1.N4 U1.N5 U1.N6 U1.N7 U1.N8 U1.N9 U1.N11 U1.N12 U1.N14 U1.N16 U1.P1 U1.P2 U1.P3 U1.P4 U1.P5 U1.P6 U1.P7 U1.P8 U1.P11 U1.P12 U1.P13 U1.P14 U1.P15 U1.R2 U1.R3 U1.R4 U1.R5 U1.R6 U1.R7 U1.R8 U1.R12 U1.R14 U1.T13 U2.4 U2.16 U2.26 U2.28 U2.29 U2.30 U2.32 U2.33 U2.34 U2.35 U2.38 U2.39 U5.40 U8.4 USB1.A6 USB1.A7 USB1.A8 USB1.B6 USB1.B7 USB1.B8 USB2.A8 USB2.B6 USB2.B7 USB2.B8
copper on no net: | length 801.5
  Top Layer w3.94: 3397.32,4652.31 3407.12,4642.51 3407.12,4591.81 ; 3432.32,4637.31 3457.12,4612.51 3457.12,4591.81 ; 3507.12,3902.82 3516.12,3893.82 v1(3516.12,3838.51) ; 3857.12,4591.81 3857.12,4616.81 3917.63,4677.31 3942.32,4677.31 3952.32,4667.31 ; v1@4042.32,5507.31 4044.28,5507.31 4056.05,5519.09
  Top Layer w10: v1(3707.32,5520.35) 3739.83,5520.35 3741.09,5519.09 ; v1(3714.07,5619.07) 3719.57,5613.57 3741.09,5613.57 ; v1(3717.32,5552.31) 3739.36,5552.31 3741.09,5550.59 ; v1(3756.72,5536.59) 3772.59,5520.72 3772.59,5519.09 ; v1(3788.15,5533.15) 3788.15,5534.65 3804.09,5550.59 ; v1(3817.96,5503.34) 3819.84,5503.34 3835.59,5519.09 ; v1(3822.32,5537.31) 3835.59,5550.59 ; v1@3851.4,5501.4 3851.4,5503.41 3867.07,5519.09 ; v1(3852.32,5537.31) 3853.8,5537.31 3867.07,5550.59 ; v1@3882.32,5537.31 3885.3,5537.31 3898.57,5550.59 ; v1(3885.49,5504.14) 3898.57,5517.22 3898.57,5519.09 ; v1@3912.32,5532.31 3912.32,5532.82 3930.07,5550.59
  Bottom Layer w3.94: v1(3516.12,3838.51) 3522.32,3832.32 3522.32,3762.32 ; v1(3667.32,5614.05) 3709.05,5614.05 v1(3714.07,5619.07) ; v1(4042.36,5507.27) 4057.32,5492.31 4057.32,5487.31
  other v1: 3851.33,5501.47 3913.64,5533.64 3882.87,5536.76

## Polygon pours and split planes (outlines as drawn)
GND on Inner1 "GND_L02_P000" (solid, pour order 0): 3055,6885 3100,6930 5635,6930 5635,2980 5615,2960 2965,2960 2965,6940 2975,6950
+3V3 on Inner2 "+3V3_L03_P001" (solid, pour order 1): 2955,6905 2995,6945 5630,6945 5630,2925 5625,2920 5605,2940 2870,2940 2870,6915 2945,6990

## Keep-outs
Board Outline Layer:
  lines w10: 3047.32,3052.16 5567,3052.16 5567,6792.31 3047.32,6792.31 3047.32,3052.16

## Other copper
Top Layer:
  region net GND: 3347.22,4672.9 3367.22,4672.9 3367.22,4657.1 3347.02,4657.1 3347.22,4657.31
  region net GND: 3422.42,3470.21 3442.42,3470.21 3442.42,3454.42 3422.21,3454.42 3422.42,3454.62
  region net GND: 3502.42,3295.21 3522.42,3295.21 3522.42,3279.42 3502.21,3279.42 3502.42,3279.62
  region net +5V: 3501.67,3330.96 3521.67,3330.96 3521.67,3315.16 3501.47,3315.16 3501.67,3315.37
  region net +1V8: 4570.47,3823.75 4590.47,3823.75 4590.47,3807.96 4570.26,3807.96 4570.47,3808.16
  region net GND: 4512.17,3743.82 4532.17,3743.82 4532.17,3728.03 4511.97,3728.03 4512.17,3728.23
  region net GND: 5304.16,3671.37 5324.16,3671.37 5324.16,3655.57 5303.95,3655.57 5304.16,3655.78
  region net +3V3: 3421.21,5846.05 3441.21,5846.05 3441.21,5830.25 3421.01,5830.25 3421.21,5830.46
  region net GND: 3602.42,5295.21 3622.42,5295.21 3622.42,5279.42 3602.21,5279.42 3602.42,5279.62
  region net +1V1: 5249.04,3672.91 5269.04,3672.91 5269.04,3657.11 5248.83,3657.11 5249.04,3657.32
  region: 3387.42,4660.21 3407.42,4660.21 3407.42,4644.42 3387.21,4644.42 3387.42,4644.62
  region: 3422.42,4645.21 3442.42,4645.21 3442.42,4629.42 3422.21,4629.42 3422.42,4629.62
Bottom Layer:
  region net DONE: 4067.42,5065.21 4087.42,5065.21 4087.42,5049.42 4067.21,5049.42 4067.42,5049.62
  region net +1V1: 4102.42,5090.21 4122.42,5090.21 4122.42,5074.42 4102.21,5074.42 4102.42,5074.62
  region net PROGRAMN: 3997.42,5034.38 4017.42,5034.38 4017.42,5018.58 3997.21,5018.58 3997.42,5018.78
  region net INITN: 3737.42,4675.21 3757.42,4675.21 3757.42,4659.42 3737.21,4659.42 3737.42,4659.62
  region net GND: 4042.42,5035.21 4062.42,5035.21 4062.42,5019.42 4042.21,5019.42 4042.42,5019.62
  region: 4044.79,5494.21 4062.11,5504.21 4070.01,5490.53 4052.52,5480.42 4052.59,5480.7

## Silkscreen, mask and mechanical layers (free items; w line width, h text height)
Top Silkscreen Layer:
  text "JTAG" at 5418.13,6205.59 h120 r90